# EAGLE board Gyro (EAGLE 8.7.0)
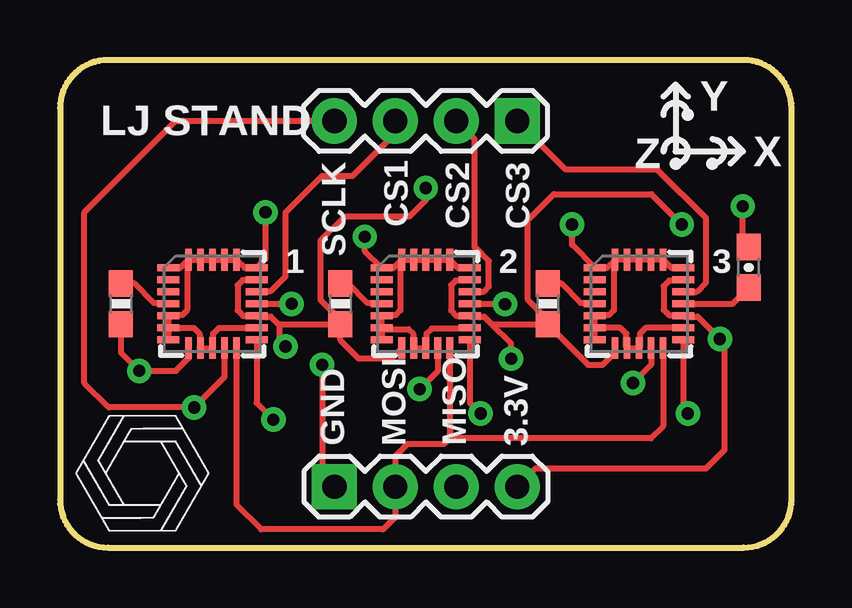
[diagram p0: board, top side]
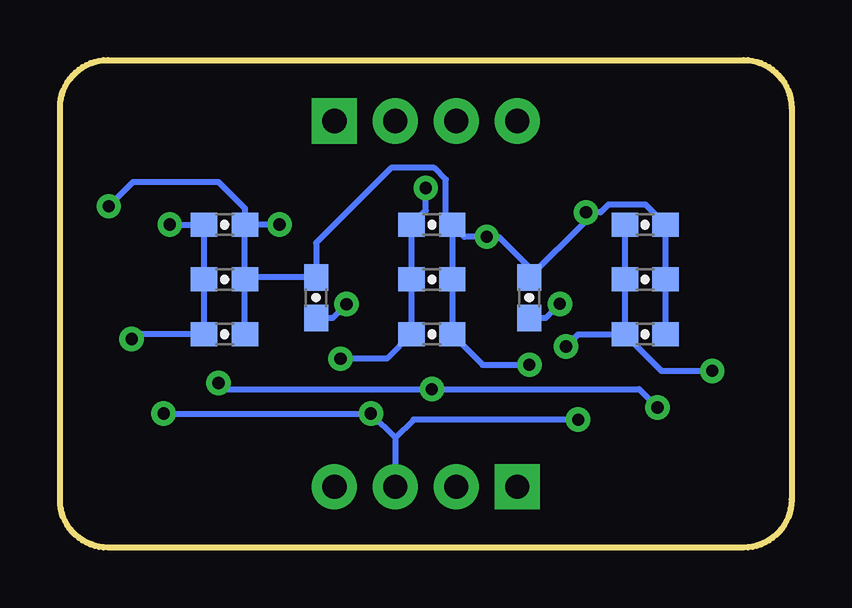
[diagram p1: board, bottom side, seen from below]

Size 30.48 x 20.32 mm. Coordinates in mm from the lower left corner, seen from the top.
Outline: 2,20.32 arc90 0,18.32 0,2 arc90 2,0 28.48,0 arc90 30.48,2 30.48,18.32 arc90 28.48,20.32 2,20.32
Copper layers (1*16): Top 0.035mm / dielectric 1.5mm / Bottom 0.035mm
Design rules "SparkFun": minimum track width 8mil, minimum drill 20mil, track to track 8mil, track to pad 8mil, pad to pad 8mil, via to via 8mil, smd to smd 8mil, copper to edge 10mil, drill to drill 8mil, minimum pad ring 12mil, minimum via ring 10mil, stop-mask expansion 4mil, vias tented up to drill 25mil, thermal gap 10mil

## Footprints (pad centres in the part's own frame; a part is rotated, then mirrored left to right if it is on the bottom)
0603-CAP = smd 1.1 x 1: 1 -0.85,0; 2 0.85,0
QFN24_0P5_4X4_ASYM_EXP = smd 0.914 x 0.279: 1 -1.84,1.5; 2 -1.84,1; 3 -1.84,0.5; 4 -1.84,0; 5 -1.84,-0.5; 6 -1.84,-1; 7 -1.84,-1.5; 13 1.84,-1.5; 14 1.84,-1; 15 1.84,-0.5; 16 1.84,0; 17 1.84,0.5; 18 1.84,1; 19 1.84,1.5 | smd 0.279 x 0.914: 8 -1,-1.84; 9 -0.5,-1.84; 10 0,-1.84; 11 0.5,-1.84; 12 1,-1.84; 20 1,1.84; 21 0.5,1.84; 22 0,1.84; 23 -0.5,1.84; 24 -1,1.84
1X04 = drill 1.016 pad 1.88 square: 1 0,0 | drill 1.016 pad 1.88: 2 2.54,0; 3 5.08,0; 4 7.62,0
0603-RES = smd 1.1 x 1: 1 -0.85,0; 2 0.85,0

## Placement (x,y rotation side)
C1  0.1uF  [0603-CAP]  6.1,8.89 0 bottom
C2  0.1uF  [0603-CAP]  6.1,11.18 0 bottom
C3  1uF  [0603-CAP]  23.62,13.46 0 bottom
C4  0.1uF  [0603-CAP]  10.92,10.41 90 bottom
C5  0.1uF  [0603-CAP]  23.62,8.89 0 bottom
C6  0.1uF  [0603-CAP]  14.99,8.89 0 bottom
C7  1uF  [0603-CAP]  23.62,11.18 0 bottom
C8  0.1uF  [0603-CAP]  19.81,10.41 90 bottom
C9  0.1uF  [0603-CAP]  14.99,11.18 0 bottom
C10  0.1uF  [0603-CAP]  6.1,13.46 0 bottom
C11  1uF  [0603-CAP]  14.99,13.46 0 bottom
C12  0.1uF  [0603-CAP]  28.7,11.68 90 top
GYRO_1  FXAS21000  [QFN24_0P5_4X4_ASYM_EXP]  6.35,10.16 0 top
GYRO_2  FXAS21000  [QFN24_0P5_4X4_ASYM_EXP]  15.24,10.16 0 top
GYRO_3  FXAS21000  [QFN24_0P5_4X4_ASYM_EXP]  24.13,10.16 0 top
J1  [1X04]  11.43,2.54 0 top
J2  [1X04]  19.05,17.78 180 top
R1  47K  [0603-RES]  2.54,10.16 270 top
R2  47K  [0603-RES]  11.68,10.16 270 top
R3  47K  [0603-RES]  20.32,10.16 270 top

## Library data of the parts
C1-C12 = SparkFun-Capacitors
GYRO_1-GYRO_3 = Freescale_Sensors_v2
J1 J2 = SparkFun-Connectors; PROD_ID: CONN-09696
R1-R3 = SparkFun-Resistors

## Nets
3.3V: C1.1 C2.1 C3.1 C5.1 C6.1 C7.1 C9.1 C10.1 C11.1 GYRO_1.8 GYRO_1.15 GYRO_1.18 GYRO_2.8 GYRO_2.15 GYRO_2.18 GYRO_3.8 GYRO_3.15 GYRO_3.18 J1.4 R1.2 R2.2 R3.2
CS1: GYRO_1.17 J2.3
CS2: GYRO_2.17 J2.2
CS3: GYRO_3.17 J2.1
GND: C1.2 C2.2 C3.2 C4.2 C5.2 C6.2 C7.2 C8.2 C9.2 C10.2 C11.2 C12.2 GYRO_1.1 GYRO_1.5 GYRO_1.6 GYRO_1.7 GYRO_1.9 GYRO_1.10 GYRO_1.14 GYRO_1.19 GYRO_1.20 GYRO_1.21 GYRO_1.22 GYRO_1.23 GYRO_1.24 GYRO_2.1 GYRO_2.5 GYRO_2.6 GYRO_2.7 GYRO_2.9 GYRO_2.10 GYRO_2.14 GYRO_2.19 GYRO_2.20 GYRO_2.21 GYRO_2.22 GYRO_2.23 GYRO_2.24 GYRO_3.1 GYRO_3.5 GYRO_3.6 GYRO_3.7 GYRO_3.9 GYRO_3.10 GYRO_3.14 GYRO_3.19 GYRO_3.20 GYRO_3.21 GYRO_3.22 GYRO_3.23 GYRO_3.24 J1.1
MISO: GYRO_1.13 GYRO_2.13 GYRO_3.13 J1.3
MOSI: GYRO_1.12 GYRO_2.12 GYRO_3.12 J1.2
N$1: GYRO_1.4 R1.1
N$2: GYRO_2.4 R2.1
N$3: C8.1 GYRO_2.16
N$4: GYRO_3.4 R3.1
N$5: C12.1 GYRO_3.16
N$6: C4.1 GYRO_1.16
SCLK: GYRO_1.11 GYRO_2.11 GYRO_3.11 J2.4

## Tracks (layer width: path | path; a pad name or v marks a point on that pad's centre or on a via)
3.3V  (via drill 0.51)
  Top 0.254: 9.14,9.31 9.1,9.31 8.78,9.63 8.22,9.63 GYRO_1.15 7.63,9.66 7.4,9.88 7.4,10.94 7.61,11.15 8.18,11.15 GYRO_1.18 | 9.14,9.31 R2.2 | 17.99,9.31 R3.2 | 17.99,9.31 17.67,9.63 17.11,9.63 GYRO_2.15 16.52,9.66 16.29,9.88 16.29,10.94 16.49,11.13 17.05,11.13 GYRO_2.18 | R1.2 2.54,8.13 v3.3,7.37 4.83,7.37 5.35,7.89 GYRO_1.8 | GYRO_3.18 25.94,11.13 25.38,11.13 25.15,10.9 25.15,9.91 25.16,9.91 25.38,9.69 25.94,9.69 GYRO_3.15 26,9.63 26.56,9.63 v27.5,8.7 27.69,8.51 27.69,4.06 26.92,3.3 19.81,3.3 J1.4 | GYRO_2.8 13.79,7.87 12.45,7.87 11.68,8.64 R2.2 | R3.2 22.01,7.62 22.61,7.62 23.13,8.14 GYRO_3.8 | 9.14,9.31 9.14,8.64 v9.4,8.38 | v18.8,7.87 18.8,8.51 17.99,9.31 | R2.2 11.68,9.49 10.85,10.32 10.85,12.8 11.85,13.79 14.55,13.79 15.24,14.48 v15.24,14.99 | R3.2 20.32,9.49 19.49,10.32 19.49,13.65 20.57,14.73 24.64,14.73 v25.91,13.46
  Bottom 0.254: C10.1 C2.1 C1.1 | v9.4,8.38 8.89,8.89 C1.1 | C1.1 5.42,7.37 v3.3,7.37 | v18.8,7.87 16.85,7.87 C6.1 C9.1 C11.1 15.24,14.06 v15.24,14.99 | v27.5,8.7 27.3,8.89 C5.1 C7.1 C3.1 v25.91,13.46
CS1
  Top 0.254: GYRO_1.17 8.22,10.69 8.78,10.69 9.4,11.3 9.4,13.97 10.92,15.49 12.19,15.49 13.97,17.27 J2.3
CS2
  Top 0.254: GYRO_2.17 17.09,10.67 17.66,10.67 17.87,10.88 17.87,11.94 17.27,12.53 17.27,17.02 J2.2
CS3
  Top 0.254: GYRO_3.17 25.98,10.67 26.55,10.67 26.92,11.05 26.92,13.72 24.89,15.75 21.08,15.75 J2.1
GND  (via drill 0.51)
  Top 0.254: GYRO_3.7 GYRO_3.6 | GYRO_3.6 GYRO_3.5 | GYRO_3.5 | GYRO_3.14 24.41,9.16 24.16,8.91 24.16,8.35 GYRO_3.10 GYRO_3.9 23.6,8.35 23.6,8.91 23.35,9.16 GYRO_3.6 | GYRO_3.19 25.47,11.66 GYRO_3.20 GYRO_3.21 GYRO_3.22 GYRO_3.23 GYRO_3.24 | GYRO_3.24 22.79,11.66 GYRO_3.1 21.34,12.61 v21.34,13.46 | GYRO_3.24 23.08,11.95 23.08,9.88 22.88,9.69 22.33,9.69 GYRO_3.5 | GYRO_2.14 17.05,9.13 15.49,9.13 15.27,8.91 15.27,8.35 GYRO_2.10 GYRO_2.9 14.71,8.35 14.71,8.91 14.52,9.11 13.45,9.11 GYRO_2.6 | GYRO_2.6 GYRO_2.7 | GYRO_2.6 GYRO_2.5 13.43,9.69 13.99,9.69 14.19,9.88 14.19,11.95 GYRO_2.24 | GYRO_2.24 13.9,11.66 GYRO_2.1 12.7,12.36 v12.7,12.95 | GYRO_2.24 GYRO_2.23 GYRO_2.22 GYRO_2.21 GYRO_2.20 16.58,11.66 GYRO_2.19 | GYRO_1.1 5.01,11.66 GYRO_1.24 | GYRO_1.24 GYRO_1.23 GYRO_1.22 GYRO_1.21 GYRO_1.20 7.69,11.66 GYRO_1.19 8.56,12.03 v8.56,13.97 | GYRO_1.5 | GYRO_1.5 GYRO_1.6 | GYRO_1.6 GYRO_1.7 | GYRO_1.6 5.57,9.16 5.82,8.91 5.82,8.35 GYRO_1.9 GYRO_1.10 6.38,8.35 6.38,8.91 6.63,9.16 GYRO_1.14 | GYRO_1.24 5.3,11.95 5.3,9.88 5.1,9.69 4.55,9.69 GYRO_1.5 | v10.92,7.62 10.92,3.05 J1.1 | C12.2 28.45,12.79 v28.45,14.22
  Bottom 0.254: C11.2 C9.2 C6.2 12.87,7.62 v10.92,7.62 | C11.2 13.63,12.95 v12.7,12.95 12.19,12.95 10.92,11.68 C4.2 8.56,13.63 v8.56,13.97 7.96,13.97 7.63,14.29 6.08,14.29 C10.2 C2.2 C1.2 | C5.2 C7.2 | C7.2 C3.2 | C7.2 22.68,11.26 C8.2 19.81,12.7 16.69,15.82 14.89,15.82 14.4,15.33 14.4,13.73 C11.2 | v21.34,13.46 C3.2 | v28.45,14.22 27.43,15.24 23.88,15.24 22.77,14.14 C3.2
MISO  (via drill 0.51)
  Top 0.254: GYRO_1.13 8.19,6.03 v8.89,5.33 | GYRO_2.13 17.08,6.03 v17.53,5.59 | GYRO_3.13 25.97,5.78 v26.16,5.59
  Bottom 0.254: v8.89,5.33 15.75,5.33 16.51,4.57 | 16.51,4.57 J1.3 | 16.51,4.57 v17.53,5.59 v26.16,5.59
MOSI
  Top 0.254: GYRO_1.12 7.35,5.1 7.35,1.79 8.38,0.76 13.46,0.76 13.97,1.27 J1.2 13.97,3.81 14.48,4.32 16,4.32 16.24,4.56 | GYRO_2.12 16.24,4.56 | 16.24,4.56 24.62,4.56 25.13,5.06 GYRO_3.12
N$1
  Top 0.254: GYRO_1.4 4.48,10.19 3.92,10.19 3.1,11.01 R1.1
N$2
  Top 0.254: GYRO_2.4 13.37,10.19 12.81,10.19 11.99,11.01 R2.1
N$3  (via drill 0.51)
  Top 0.254: GYRO_2.16 v18.53,10.16 v18.54,10.15
  Bottom 0.254: v18.54,10.15 19.13,9.56 C8.1
N$4
  Top 0.254: GYRO_3.4 22.26,10.19 21.7,10.19 20.88,11.01 R3.1
N$5
  Top 0.254: GYRO_3.16 28.03,10.16 C12.1
N$6  (via drill 0.51)
  Top 0.254: GYRO_1.16 v9.65,10.16
  Bottom 0.254: v9.65,10.16 10.25,9.56 C4.1
SCLK  (via drill 0.51)
  Top 0.254: GYRO_1.11 6.85,7.1 v5.59,5.84 2.03,5.84 1.02,6.86 1.02,13.97 4.83,17.78 J2.4 | GYRO_2.11 15.74,7.36 v14.99,6.6 | GYRO_3.11 24.63,7.61 v23.88,6.86
  Bottom 0.254: v5.59,5.84 6.35,6.6 v14.99,6.6 23.62,6.6 v23.88,6.86

## Text on the board
tPlace: Y | LJ STAND | SCLK | CS1 | CS2 | CS3 | Z | X | 1 | 2 | 3 | GND | MOSI | MISO | 3.3V